# EAGLE board motherboard (EAGLE 4.16)
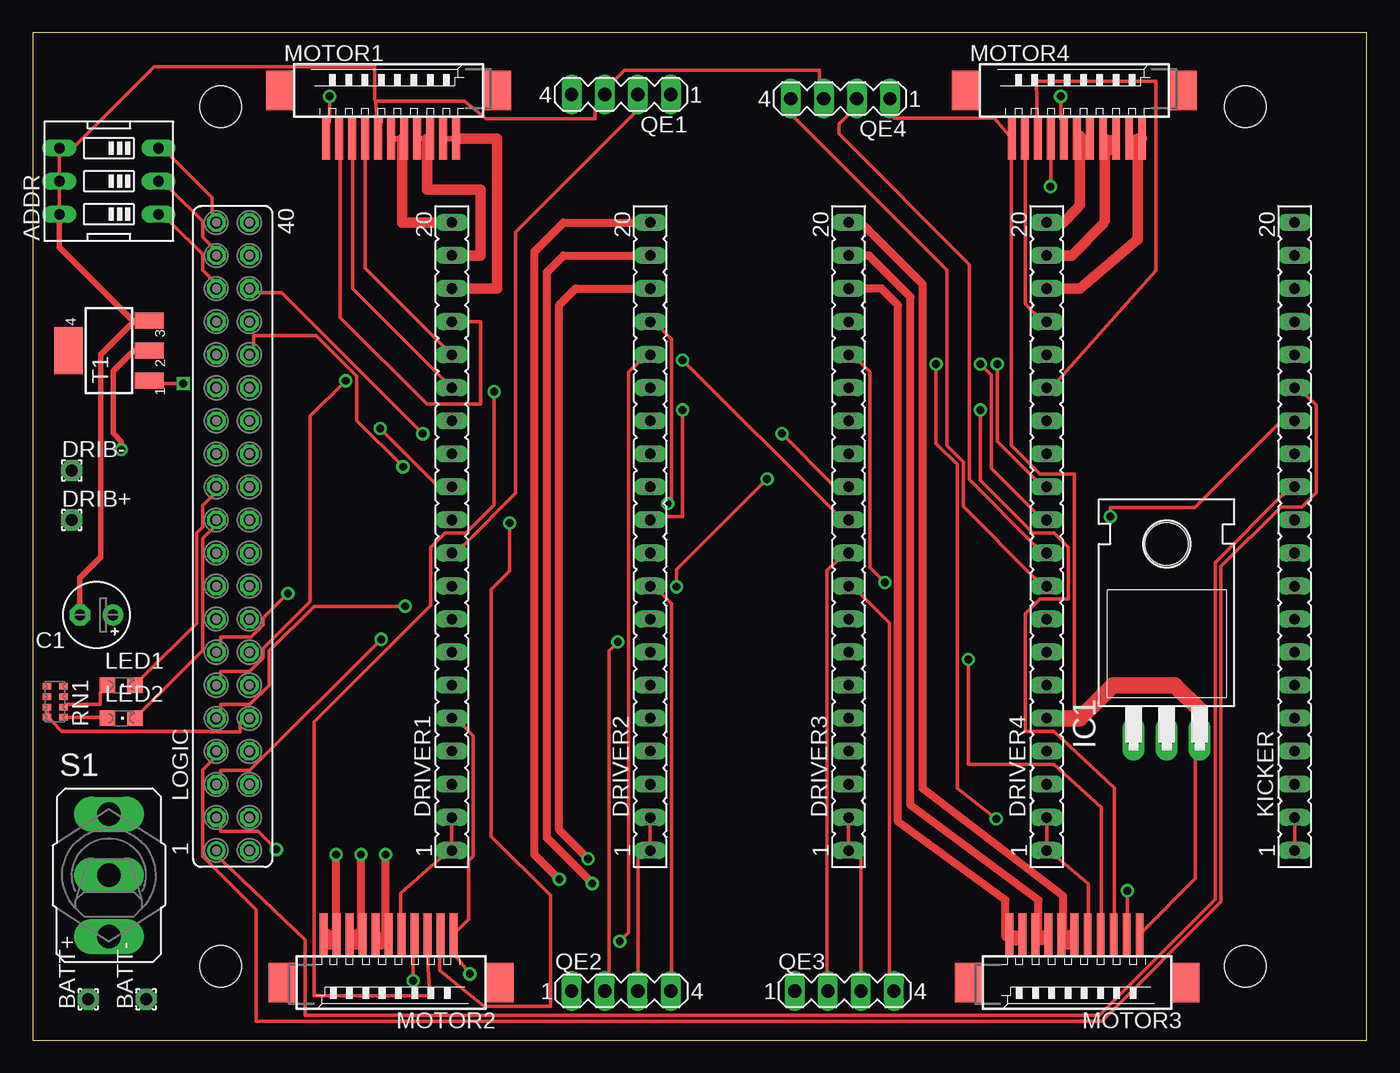
[diagram p0: board, top side]
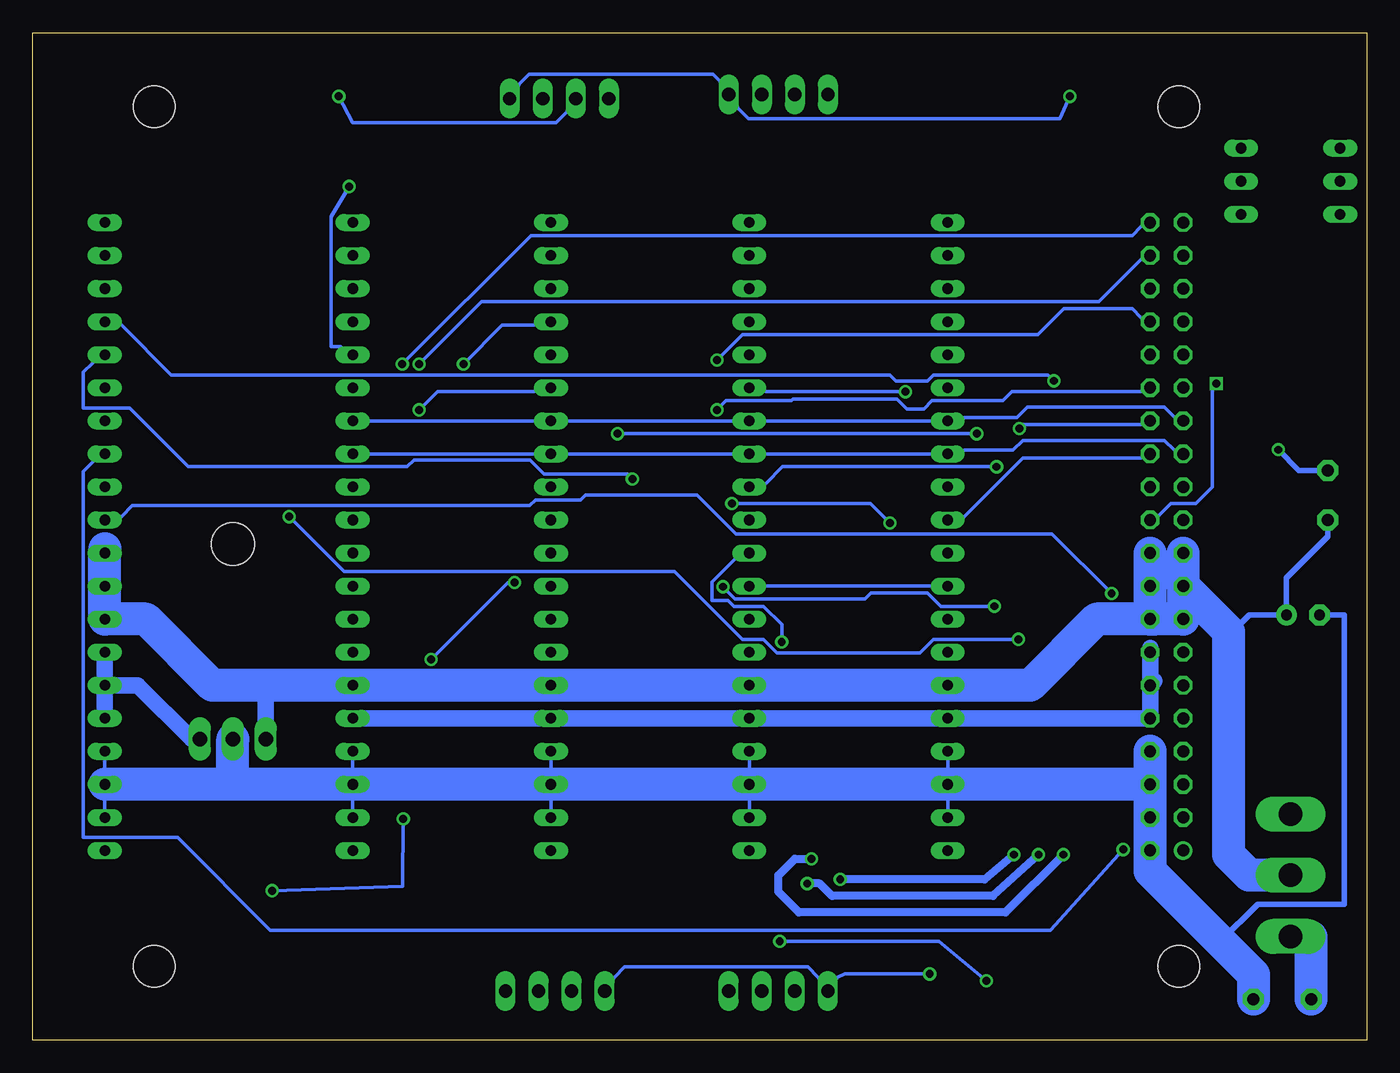
[diagram p1: board, bottom side, seen from below]

Size 102.54 x 77.46 mm. Coordinates in mm from the lower left corner, seen from the top.
Outline: 0,0 102.54,0 102.54,77.46 0,77.46 0,0
Copper layers (1*16): Top 0.035mm / dielectric 1.5mm / Bottom 0.035mm
Design rules "default": minimum track width 10mil, minimum drill 24mil, track to track 8mil, track to pad 8mil, pad to pad 8mil, via to via 8mil, smd to smd 8mil, copper to edge 40mil, drill to drill 8mil, minimum pad ring 10mil, minimum via ring 8mil, stop-mask expansion 4mil, vias tented up to drill 0mil, thermal gap 10mil
Net classes: 1 supply: width 0.508 mm; 2 motor: width 0.508 mm
Holes 3.2 mm at 14.44,5.71 14.44,71.75 93.18,5.71 93.18,71.75

## Footprints (pad centres in the part's own frame; a part is rotated, then mirrored left to right if it is on the bottom)
EDG-03 = drill 0.813 long: 1 -2.54,-3.81; 2 0,-3.81; 3 2.54,-3.81; 4 2.54,3.81; 5 0,3.81; 6 -2.54,3.81
1,6/0,9 = drill 0.914 pad 1.6 octagon: 1 0,0
E2,5-5 = drill 0.813 pad 1.6 round: + -1.27,0 | drill 0.813 pad 1.6 octagon: - 1.27,0
FE20 = drill 0.813 long: 1 -24.13,0; 2 -21.59,0; 3 -19.05,0; 4 -16.51,0; 5 -13.97,0; 6 -11.43,0; 7 -8.89,0; 8 -6.35,0; 9 -3.81,0; 10 -1.27,0; 11 1.27,0; 12 3.81,0; 13 6.35,0; 14 8.89,0; 15 11.43,0; 16 13.97,0; 17 16.51,0; 18 19.05,0; 19 21.59,0; 20 24.13,0
TO220H = drill 1.118 long: 1 -2.54,-10.16; 2 0,-10.16; 3 2.54,-10.16 | hole 3.302: 0,4.826
CHIPLED_0805 = smd 1.2 x 1.2: A 0,-1.05; C 0,1.05
FE20-2 = drill 0.914 round: 1 -24.13,1.27 | drill 0.914 octagon: 2 -24.13,-1.27; 3 -21.59,1.27; 4 -21.59,-1.27; 5 -19.05,1.27; 6 -19.05,-1.27; 7 -16.51,1.27; 8 -16.51,-1.27; 9 -13.97,1.27; 10 -13.97,-1.27; 11 -11.43,1.27; 12 -11.43,-1.27; 13 -8.89,1.27; 14 -8.89,-1.27; 15 -6.35,1.27; 16 -6.35,-1.27; 17 -3.81,1.27; 18 -3.81,-1.27; 19 -1.27,1.27; 20 -1.27,-1.27; 21 1.27,1.27; 22 1.27,-1.27; 23 3.81,1.27; 24 3.81,-1.27; 25 6.35,1.27; 26 6.35,-1.27; 27 8.89,1.27; 28 8.89,-1.27; 29 11.43,1.27; 30 11.43,-1.27; 31 13.97,1.27; 32 13.97,-1.27; 33 16.51,1.27; 34 16.51,-1.27; 35 19.05,1.27; 36 19.05,-1.27; 37 21.59,1.27; 38 21.59,-1.27; 39 24.13,1.27; 40 24.13,-1.27
53261-11 = smd 0.6 x 3.2: P$1 -3,-3.1; P$2 -2,-3.1; P$3 -1,-3.1; P$4 0,-3.1; P$5 1,-3.1; P$6 2,-3.1; P$7 3,-3.1; P$8 4,-3.1; P$9 5,-3.1; P$10 6,-3.1; P$11 7,-3.1 | smd 2.1 x 3: S1 10.15,0.625; S2 -6.55,0.625
MA04-1 = drill 1.016 long: 1 -3.81,0; 2 -1.27,0; 3 1.27,0; 4 3.81,0
0603-ARC = smd 0.5 x 0.65: 1 -1.2,-0.625; 2 -0.4,-0.625; 3 0.4,-0.625; 4 1.2,-0.625; 5 1.2,0.625; 6 0.4,0.625; 7 -0.4,0.625; 8 -1.2,0.625
M9040P = drill 1.803 long: 1 0,4.699; 2 0,0; 3 0,-4.699
SOT223 = smd 1.219 x 2.235: 1 -2.311,-3.099; 2 0,-3.099; 3 2.311,-3.099 | smd 3.6 x 2.2: 4 0,3.099

## Placement (x,y rotation side)
ADDR  [EDG-03]  5.87,66.03 90 top
BATT+  [1,6/0,9]  4.28,3.17 90 top
BATT-  [1,6/0,9]  8.73,3.17 90 top
C1  [E2,5-5]  4.92,32.7 180 top
DRIB+  [1,6/0,9]  3.01,40 0 top
DRIB-  [1,6/0,9]  3.01,43.81 0 top
DRIVER1  [FE20]  32.22,38.73 90 top
DRIVER2  [FE20]  47.46,38.73 90 top
DRIVER3  [FE20]  62.7,38.73 90 top
DRIVER4  [FE20]  77.94,38.73 90 top
IC1  7805T  [TO220H]  87.15,33.33 0 top
KICKER  [FE20]  96.99,38.73 90 top
LED1  [CHIPLED_0805]  6.82,27.3 270 top
LED2  [CHIPLED_0805]  6.82,24.76 270 top
LOGIC  [FE20-2]  15.39,38.73 90 top
MOTOR1  [53261-11]  25.55,72.38 0 top
MOTOR2  [53261-11]  29.36,5.08 180 top
MOTOR3  [53261-11]  82.07,5.08 180 top
MOTOR4  [53261-11]  78.26,72.38 0 top
QE1  [MA04-1]  45.24,72.7 180 top
QE2  [MA04-1]  45.24,3.8 0 top
QE3  [MA04-1]  62.38,3.8 0 top
QE4  [MA04-1]  62.06,72.38 180 top
RN1  [0603-ARC]  1.74,26.03 90 top
S1  [M9040P]  5.87,12.7 0 top
T1  [SOT223]  5.87,53.02 90 top

## Library data of the parts
ADDR = special
BATT+ BATT- DRIB+ DRIB- = wirepad
C1 = rcl
DRIVER1-DRIVER4 KICKER LOGIC = con-lsta
IC1 = linear
LED1 LED2 = led
MOTOR1-MOTOR4 = brushless
QE1-QE4 = con-lstb
RN1 = resistor-dil
S1 = switch
T1 = zetex

## Nets
+5V: DRIVER1.5 DRIVER2.5 DRIVER3.5 DRIVER4.5 IC1.3 KICKER.5 KICKER.6 KICKER.7 LOGIC.10 LOGIC.12 LOGIC.14 MOTOR1.P$1 MOTOR2.P$1 MOTOR3.P$1 MOTOR4.P$1 QE1.1 QE2.1 QE3.1 QE4.1 RN1.7 RN1.8
+12V: C1.+ DRIB+.1 DRIVER1.6 DRIVER2.6 DRIVER3.6 DRIVER4.6 IC1.1 KICKER.8 KICKER.9 KICKER.10 LOGIC.15 LOGIC.16 LOGIC.17 LOGIC.18 LOGIC.19 LOGIC.20 S1.2
ADDR1: ADDR.3 LOGIC.39
ADDR2: ADDR.2 LOGIC.37
ADDR3: ADDR.1 LOGIC.35
CAP: KICKER.16 LOGIC.9
CHARGE: KICKER.11 LOGIC.13
DIR1: DRIVER1.12 LOGIC.28
DIR2: DRIVER2.12 LOGIC.32
DIR3: DRIVER3.12 LOGIC.36
DIR4: DRIVER4.12 LOGIC.40
DISCHARGE: KICKER.17 LOGIC.11
DRIBBLER: LOGIC.22 T1.1
GND: ADDR.4 ADDR.5 ADDR.6 BATT-.1 C1.- DRIVER1.1 DRIVER1.2 DRIVER1.3 DRIVER1.4 DRIVER2.1 DRIVER2.2 DRIVER2.3 DRIVER2.4 DRIVER3.1 DRIVER3.2 DRIVER3.3 DRIVER3.4 DRIVER4.1 DRIVER4.2 DRIVER4.3 DRIVER4.4 IC1.2 KICKER.1 KICKER.2 KICKER.3 KICKER.4 LOGIC.2 LOGIC.4 LOGIC.6 LOGIC.8 MOTOR1.P$5 MOTOR2.P$5 MOTOR3.P$5 MOTOR4.P$5 QE1.3 QE2.3 QE3.3 QE4.3 T1.3
KICK1: KICKER.15 LOGIC.7
KICK2: KICKER.14 LOGIC.5
KICK3: KICKER.13 LOGIC.3
KICK4: KICKER.12 LOGIC.1
LED1: LED1.C LOGIC.23
LED2: LED2.C LOGIC.21
M1H1: DRIVER1.15 MOTOR1.P$3
M1H2: DRIVER1.16 MOTOR1.P$4
M1H3: DRIVER1.17 MOTOR1.P$2
M1P1: DRIVER1.18 MOTOR1.P$10 MOTOR1.P$11
M1P2: DRIVER1.19 MOTOR1.P$8 MOTOR1.P$9
M1P3: DRIVER1.20 MOTOR1.P$6 MOTOR1.P$7
M2H1: DRIVER2.15 MOTOR2.P$3
M2H2: DRIVER2.16 MOTOR2.P$4
M2H3: DRIVER2.17 MOTOR2.P$2
M2P1: DRIVER2.18 MOTOR2.P$10 MOTOR2.P$11
M2P2: DRIVER2.19 MOTOR2.P$8 MOTOR2.P$9
M2P3: DRIVER2.20 MOTOR2.P$6 MOTOR2.P$7
M3H1: DRIVER3.15 MOTOR3.P$3
M3H2: DRIVER3.16 MOTOR3.P$4
M3H3: DRIVER3.17 MOTOR3.P$2
M3P1: DRIVER3.18 MOTOR3.P$10 MOTOR3.P$11
M3P2: DRIVER3.19 MOTOR3.P$8 MOTOR3.P$9
M3P3: DRIVER3.20 MOTOR3.P$6 MOTOR3.P$7
M4H1: DRIVER4.15 MOTOR4.P$3
M4H2: DRIVER4.16 MOTOR4.P$4
M4H3: DRIVER4.17 MOTOR4.P$2
M4P1: DRIVER4.18 MOTOR4.P$10 MOTOR4.P$11
M4P2: DRIVER4.19 MOTOR4.P$8 MOTOR4.P$9
M4P3: DRIVER4.20 MOTOR4.P$6 MOTOR4.P$7
N$1: LED2.A RN1.1
N$2: BATT+.1 S1.3
N$3: LED1.A RN1.2
N$4: DRIB-.1 T1.2
QEA1: DRIVER1.10 QE1.2
QEA2: DRIVER2.10 QE2.2
QEA3: DRIVER3.10 QE3.2
QEA4: DRIVER4.10 QE4.2
QEB1: QE1.4
QEB2: DRIVER1.9 DRIVER2.9 QE2.4
QEB3: DRIVER3.9 QE3.4
QEB4: DRIVER4.9 QE4.4
RX: DRIVER1.13 DRIVER2.13 DRIVER3.13 DRIVER4.13 LOGIC.25
SPEED1: DRIVER1.11 LOGIC.26
SPEED2: DRIVER2.11 LOGIC.30
SPEED3: DRIVER3.11 LOGIC.34
SPEED4: DRIVER4.11 LOGIC.38
TX: DRIVER1.14 DRIVER2.14 DRIVER3.14 DRIVER4.14 LOGIC.27

## Tracks (layer width: path | path; a pad name or v marks a point on that pad's centre or on a via)
+5V  (via drill 0.61)
  Top 0.254: QE4.1 66.2,70.89 66.2,70.86 73.91,70.86 MOTOR4.P$1 75.21,68.91 75.21,45.73 77.41,43.53 80.05,43.53 80.05,24.76 | v22.82,72.55 22.82,70.86 MOTOR1.P$1 | DRIVER1.5 33.16,24.12 33.87,23.41 33.87,14.17 33.49,13.79 33.49,9.29 32.75,8.55 MOTOR2.P$1 32.44,6.6 v33.6,5.11 | MOTOR3.P$1 85.46,8.55 89.34,12.44 89.34,21.51 IC1.3 | RN1.7 1.16,25.39 1.16,25.06 RN1.8 1.44,24.58 2.25,23.77 13.63,23.77 13.63,23.74 13.65,23.72 15.96,23.72 15.96,24.45 LOGIC.10
  Top 1.27: IC1.3 89.69,25.39 87.78,27.3 83.02,27.3 80.48,24.76 80.05,24.76 DRIVER4.5 77.62,24.76
  Bottom 0.254: v22.82,72.55 23.58,70.84 47.51,70.84 48.3,71.62 QE1.1 49.8,73.78 50.25,74.24 64.38,74.24 65.14,73.48 QE4.1 | QE3.1 57.82,4.87 57.04,5.66 42.96,5.66 42.18,4.87 QE2.1 40.68,4.87 40.12,5.11 v33.6,5.11
  Bottom 1.27: DRIVER4.5 DRIVER3.5 DRIVER2.5 DRIVER1.5 LOGIC.10 LOGIC.12 | KICKER.6 KICKER.5 | KICKER.6 KICKER.7 | IC1.3 90.32,23.17 94.45,27.3 KICKER.6 | LOGIC.12 16.34,27.62 | 16.66,30.16 LOGIC.14 LOGIC.12
+12V
  Bottom 0.254: LOGIC.16 15.91,31.34
  Bottom 0.406: C1.+ 9.04,32.7 10.63,31.11 | DRIB+.1 3.01,38.73 6.18,35.55 C1.+ | C1.+ 6.18,32.38
  Bottom 1.27: 84.61,27.3 IC1.1
  Bottom 2.54: DRIVER2.6 47.78,27.3 | DRIVER2.6 DRIVER1.6 25.87,27.3 20.79,32.38 LOGIC.16 | DRIVER2.6 DRIVER3.6 DRIVER4.6 84.61,27.3 88.73,27.3 93.81,32.38 KICKER.8 KICKER.9 KICKER.10 96.99,37.78 | LOGIC.16 16.66,32.7 16.34,32.38 LOGIC.15 LOGIC.17 | LOGIC.17 LOGIC.19 LOGIC.17 | LOGIC.20 LOGIC.18 LOGIC.16 | S1.2 9.04,12.7 10.63,14.28 10.63,31.11 10.63,31.43 LOGIC.17
ADDR1
  Top 0.254: ADDR.3 10.63,67.94 13.81,64.77 13.81,63.55 LOGIC.39
ADDR2
  Top 0.254: ADDR.2 10.63,65.4 13.07,62.96 13.07,61.74 13.81,61.01 LOGIC.37
ADDR3
  Top 0.254: ADDR.1 10.63,62.86 13.07,60.42 13.07,59.2 13.81,58.47 LOGIC.35
CAP  (via drill 0.61)
  Top 0.254: v56.45,43.15 49.49,36.19 v49.49,34.87 | v28.64,33.37 21.63,33.37 18.17,29.92 18.17,27.3 16.7,25.83 14.44,25.83 14.44,25.45 LOGIC.9
  Bottom 0.254: v56.45,43.15 56.83,43.53 63.23,43.53 64.33,44.62 73.22,44.62 73.75,44.09 90.56,44.09 95.08,48.61 98.64,48.61 98.64,51.35 97.93,52.07 KICKER.16 | v49.49,34.87 48.55,33.93 38.57,33.93 38.11,34.39 33.77,34.39 32.75,33.37 v28.64,33.37
CHARGE  (via drill 0.61)
  Top 0.254: v19.62,34.36 17.72,32.46 17.72,31.92 16.8,31.01 14.44,31.01 14.44,30.53 LOGIC.13
  Bottom 0.254: v19.62,34.36 24.19,38.93 48.48,38.93 51.47,41.93 60.06,41.93 60.44,41.55 63.89,41.55 64.35,41.09 94.88,41.09 95.69,40.28 KICKER.11
DIR1  (via drill 0.61)
  Top 0.254: v26.71,47.04 30.92,42.82 DRIVER1.12
  Bottom 0.254: v26.71,47.04 26.43,47.32 17.36,47.32 LOGIC.28
DIR2  (via drill 0.61)
  Top 0.254: v28.46,44.09 24.9,47.65 24.9,51.05 21.78,54.17 16.98,54.17 16.98,53.39 LOGIC.32
  Bottom 0.254: v28.46,44.09 44.89,44.09 46.16,42.82 DRIVER2.12
DIR3  (via drill 0.61)
  Top 0.254: v57.59,46.63 61.41,42.82 DRIVER3.12 | v29.98,46.63 19.14,57.48 17.36,57.48 LOGIC.36
  Bottom 0.254: v29.98,46.63 v57.59,46.63
DIR4  (via drill 0.61)
  Top 0.254: v74.13,51.99 74.13,46.05 77,43.18 DRIVER4.12
  Bottom 0.254: v74.13,51.99 64.25,61.87 18.05,61.87 17.36,62.55 LOGIC.40
DISCHARGE  (via drill 0.61)
  Top 0.254: v24.07,50.69 21.35,47.98 21.35,33.75 17.72,30.12 17.72,29.38 16.7,28.37 14.44,28.37 14.44,27.99 LOGIC.11
  Bottom 0.254: v24.07,50.69 24.52,51.15 33.31,51.15 33.77,50.69 36.18,50.69 36.64,51.15 91.89,51.15 95.69,54.96 KICKER.17
DRIBBLER  (via drill 0.6)
  Top 0.254: v11.58,50.48 8.73,50.48 8.41,50.8 9.04,50.8 T1.1
  Bottom 0.254: LOGIC.22 16.34,40 15.08,41.27 13.17,41.27 11.9,42.54 11.9,50.16 v11.58,50.48
GND  (via drill 0.61)
  Top 0.254: 26.35,72.17 26.49,70.72 26.81,70.86 MOTOR1.P$5 | 26.35,72.17 33.19,72.17 34.84,70.84 43.22,70.84 43.22,71.62 QE1.3 44.72,73.78 45.5,74.57 60.46,74.57 60.46,73.88 QE4.3 | v79.01,72.55 79.01,70.86 MOTOR4.P$5 | DRIVER3.2 DRIVER3.1 63.64,13.97 63.64,5.3 QE3.3 | DRIVER2.2 DRIVER2.1 46.52,13.97 46.52,5.3 QE2.3 | MOTOR2.P$5 28.3,8.55 28.3,11.3 31.28,13.97 DRIVER1.1 DRIVER1.2 | MOTOR3.P$5 81.13,8.55 81.13,12.04 78.88,13.97 DRIVER4.1 DRIVER4.2 | KICKER.2 KICKER.1 | ADDR.6 2.07,64.13 2.07,65.4 ADDR.5 2.07,66.67 2.07,67.94 ADDR.4 3.37,68.85 9.36,74.85 26.3,74.85 26.3,72.28 26.35,72.17
  Top 0.406: C1.- 3.64,35.55 5.23,37.14 5.23,52.7 7.77,55.24 | T1.3 8.97,55.32 9.04,55.24 7.77,55.24 | ADDR.6 2.06,60.96 7.77,55.24
  Bottom 0.254: v79.01,72.55 77.94,70.53 62.29,70.53 61.53,71.29 QE4.3 | DRIVER1.2 DRIVER1.3 DRIVER1.4 | DRIVER2.4 DRIVER2.3 DRIVER2.2 | DRIVER3.4 DRIVER3.3 DRIVER3.2 | DRIVER4.2 DRIVER4.3 DRIVER4.4 | KICKER.4 KICKER.3 KICKER.2
  Bottom 0.406: C1.- 1.74,32.7 1.74,10.47 8.41,10.47 11.27,7.62 11.58,7.3
  Bottom 2.54: LOGIC.6 DRIVER1.3 DRIVER2.3 DRIVER3.3 DRIVER4.3 87.15,19.68 | 87.15,19.68 KICKER.3 | LOGIC.6 LOGIC.4 LOGIC.2 16.66,13.01 11.27,7.62 8.73,5.08 BATT-.1 | 87.15,19.68 IC1.2 | LOGIC.6 LOGIC.8
KICK1
  Top 0.254: KICKER.15 97.93,49.53 98.64,48.81 98.64,42.11 97.52,40.99 95.8,40.99 95.8,40.89 91.33,36.42 91.33,10.64 82.18,1.49 17.18,1.49 17.18,10.03 13.07,14.14 13.07,20.8 13.81,21.53 LOGIC.7
KICK2  (via drill 0.61)
  Top 0.254: v82.82,40.25 82.82,40.97 89.32,40.97 95.69,47.34 KICKER.14 | v26.78,30.83 16.7,20.75 14.44,20.75 14.44,20.37 LOGIC.5
  Bottom 0.254: v82.82,40.25 78.6,36.04 53.2,36.04 47.99,30.83 46.37,30.83 45.33,29.79 34.35,29.79 33.31,30.83 v26.78,30.83
KICK3  (via drill 0.61)
  Top 0.254: v18.73,14.68 17.34,16.07 14.44,16.07 14.44,16.45 LOGIC.3
  Bottom 0.254: v18.73,14.68 24.32,8.45 84.27,8.45 91.4,15.59 98.64,15.59 98.64,43.73 97.93,44.45 KICKER.13
KICK4
  Top 0.254: KICKER.12 96.05,41.91 90.87,36.72 90.87,10.84 81.98,1.95 20.93,1.95 20.93,7.74 14.44,13.91 LOGIC.1
LED1
  Top 0.254: LED1.C 8.45,27.88 12.61,32.05 12.61,38.98 13.07,39.44 13.07,41.12 13.81,41.85 LOGIC.23
LED2
  Top 0.254: LED2.C 8.45,25.34 13.07,29.97 13.07,38.58 13.81,39.31 LOGIC.21
M1H1
  Top 0.254: MOTOR1.P$3 24.6,69.24 24.6,57.78 DRIVER1.15
M1H2
  Top 0.254: MOTOR1.P$4 25.55,59.37 DRIVER1.16
M1H3
  Top 0.254: 32.54,55.24 DRIVER1.17 34.44,55.24 34.44,48.89 30.31,48.89 23.65,55.56 23.65,69.19 MOTOR1.P$2
M1P1
  Top 0.406: MOTOR1.P$11 32.54,69.28 | 32.54,69.28 MOTOR1.P$10 | 32.54,69.28 32.54,69.53
  Top 0.813: DRIVER1.18 35.71,57.78 35.71,69.28 MOTOR1.P$11
M1P2
  Top 0.406: 29.68,69.28 MOTOR1.P$8 | 29.68,69.28 MOTOR1.P$9 30.31,69.28 | 29.68,69.28 29.68,69.21
  Top 0.813: 30.31,69.28 30.31,69.21 30.31,65.4 34.44,65.4 34.44,60.32 DRIVER1.19
M1P3
  Top 0.406: 27.77,69.28 MOTOR1.P$6 | 27.77,69.28 MOTOR1.P$7 28.41,69.28 | 27.77,69.28 27.77,69.21
  Top 0.813: DRIVER1.20 28.41,62.86 28.41,69.28
M2H1  (via drill 0.61)
  Top 0.254: v35.47,49.86 35.47,41.17 33.41,39.11 33.41,39.01 31.69,39.01 30.57,37.89 30.57,33.42 21.63,24.48 21.63,3.44 30.54,3.44 30.39,5.51 30.39,6.6 MOTOR2.P$3
  Bottom 0.254: v35.47,49.86 35.5,49.88 46.16,49.88 DRIVER2.15
M2H2  (via drill 0.61)
  Top 0.254: v29.23,4.59 29.23,6.6 MOTOR2.P$4 | v45.12,7.62 45.81,8.3 45.81,51.35 46.52,52.07 DRIVER2.16
  Bottom 0.254: v29.23,4.59 32.89,7.62 v45.12,7.62
M2H3  (via drill 0.61)
  Top 0.254: v36.66,39.77 36.66,36.06 35.24,34.64 35.24,15.69 39.79,11.15 39.79,2.61 34.71,2.61 31.29,5.39 31.29,6.6 MOTOR2.P$2 | v48.81,41.27 49.11,41.58 49.11,53.89 48.4,54.61 DRIVER2.17
  Bottom 0.254: v36.66,39.77 38.16,41.27 v48.81,41.27
M2P1  (via drill 0.6)
  Top 0.61: DRIVER2.18 41.74,57.78 40.48,56.51 40.48,16.19 v42.7,13.97 | v23.33,14.28 23.33,7.62 23.36,7.58 MOTOR2.P$10 23.01,8.18 23.01,7.3 22.7,7.3 22.7,8.18 | 22.7,8.18 22.7,8.25 | MOTOR2.P$11 22.7,8.18
  Bottom 0.61: v42.7,13.97 43.97,13.97 45.24,12.7 45.24,11.43 43.65,9.84 27.77,9.84 v23.33,14.28
M2P2  (via drill 0.6)
  Top 0.61: DRIVER2.19 40.79,60.32 39.52,59.05 39.52,15.55 v43.02,12.06 | v25.23,14.28 25.23,7.62 25.27,7.58 MOTOR2.P$8 24.92,8.18 | MOTOR2.P$9 24.6,8.18 24.6,7.3 24.92,7.3 24.92,8.18 | 24.92,8.18 24.92,8.25
  Bottom 0.61: v43.02,12.06 42.06,12.06 41.11,11.11 28.73,11.11 v25.23,14.28
M2P3  (via drill 0.6)
  Top 0.254: MOTOR2.P$6 27.09,7.76 26.99,7.59
  Top 0.61: DRIVER2.20 40.79,62.86 38.57,60.64 38.57,14.28 v40.48,12.38 | MOTOR2.P$6 27.36,7.52 27.14,7.3 v27.14,14.28 | MOTOR2.P$7 26.5,8.18 26.5,7.3 26.82,7.3 26.82,7.76 | 26.82,7.76 26.82,7.93 | 26.82,7.76 27.09,7.76
  Bottom 0.61: v40.48,12.38 29.36,12.38 v27.14,14.28
M3H1  (via drill 0.61)
  Top 0.254: v72.83,48.46 72.83,43.02 76.75,39.11 76.75,39.01 78.47,39.01 79.59,37.89 79.59,33.93 77.41,33.93 76.29,32.81 76.29,23.77 78.47,23.77 83.13,19.43 83.13,8.55 MOTOR3.P$3
  Bottom 0.254: v72.83,48.46 71.41,49.88 63.99,49.88 DRIVER3.15
M3H2  (via drill 0.61)
  Top 0.254: v71.92,29.28 71.92,21.23 78.47,21.23 82.12,17.9 82.12,8.87 MOTOR3.P$4 | v65.49,35.2 64.35,36.34 64.35,51.35 63.64,52.07 DRIVER3.16
  Bottom 0.254: v71.92,29.28 66,35.2 v65.49,35.2
M3H3  (via drill 0.61)
  Top 0.254: v84.12,11.51 84.12,8.55 MOTOR3.P$2 | v74.05,17.04 71.08,19.38 71.08,44.24 69.43,45.89 v69.43,51.99
  Bottom 0.254: v84.12,11.51 74.11,11.84 v74.05,17.04 | v69.43,51.99 66.46,54.96 63.99,54.96 DRIVER3.17
M3P1
  Top 0.61: DRIVER3.18 65.24,57.78 66.51,56.51 66.51,16.82 74.77,10.79 74.77,7.93 75.08,7.93 | MOTOR3.P$10 75.4,8.18 75.4,7.62 | 75.4,7.62 75.72,7.62 | 75.08,8.18 75.08,8.25 | 75.4,7.62 75.08,7.62 75.08,7.93 | 75.08,8.18 75.08,7.93 | MOTOR3.P$11 75.08,8.18
M3P2
  Top 0.61: DRIVER3.19 64.29,60.32 67.46,57.15 67.46,18.09 77.3,10.79 77.3,7.62 77.94,7.62 | MOTOR3.P$9 77.94,8.18 | 77.98,7.58 77.94,7.58 77.94,7.62 | 77.94,8.18 77.94,8.25 | 77.94,8.18 MOTOR3.P$8 | 77.94,8.18 77.94,7.62
M3P3
  Top 0.61: DRIVER3.20 63.65,62.86 68.41,58.1 68.41,19.36 79.21,11.11 79.21,7.62 79.17,7.58 MOTOR3.P$7 79.53,8.18 79.53,7.3 79.84,7.3 79.84,8.18 | 79.84,8.18 79.84,8.25 | 79.84,8.18 MOTOR3.P$6
M4H1
  Top 0.254: MOTOR4.P$3 77.19,71.5 77.19,72.17 77.14,73.71 86.31,73.71 86.31,59.18 78.88,50.8 DRIVER4.15
M4H2  (via drill 0.61)
  Top 0.254: v78.21,65.63 78.26,65.63 MOTOR4.P$4
  Bottom 0.254: v78.21,65.63 79.59,63.29 79.59,53.34 78.88,53.34 DRIVER4.16
M4H3
  Top 0.254: MOTOR4.P$2 76.29,68.91 76.29,56.59 77,55.88 DRIVER4.17
M4P1
  Top 0.61: MOTOR4.P$11 85.24,69.28 | 85.24,69.28 MOTOR4.P$10 | 85.24,69.28 85.24,69.21
  Top 0.813: DRIVER4.18 80.48,57.78 84.89,61.56 84.92,61.56 84.92,69.28 MOTOR4.P$11
  Top 1.016: DRIVER4.18 77.62,57.78
M4P2
  Top 0.61: 83.02,69.28 MOTOR4.P$9 | 82.39,69.28 83.02,69.28 | 83.02,69.28 83.02,69.21 | 82.39,68.26 82.7,68.26 82.7,69.28 MOTOR4.P$8
  Top 0.813: DRIVER4.19 79.84,60.32 82.26,62.73 82.39,63.05 82.39,68.26 82.39,69.28
M4P3
  Top 0.61: 80.48,67.94 80.8,67.94 80.8,69.28 MOTOR4.P$7 | 80.48,69.28 MOTOR4.P$6
  Top 0.813: DRIVER4.20 79.21,62.86 80.26,63.91 80.48,64.22 80.48,67.94 80.48,69.28 80.48,69.53
  Top 1.016: DRIVER4.20 77.62,62.86
N$1
  Top 0.254: RN1.1 2.68,24.84 5.19,24.84 LED2.A
N$2
  Bottom 2.54: BATT+.1 4.28,7.93 5.87,7.93 S1.3
N$3
  Top 0.254: RN1.2 2.68,25.83 5.19,25.83 5.19,26.72 LED1.A
N$4  (via drill 0.6)
  Top 0.406: v6.82,45.4 6.82,46.03 6.18,46.67 6.18,51.43 7.77,53.02 T1.2
  Bottom 0.406: DRIB-.1 5.23,43.81 v6.82,45.4
QEA1
  Top 0.254: DRIVER1.10 33.16,38.1 37.12,42.06 37.12,62.12 46.19,71.19 QE1.2
QEA2  (via drill 0.61)
  Top 0.254: v44.97,30.63 44.28,29.94 44.28,5.3 QE2.2
  Bottom 0.254: v44.97,30.63 44.97,31.97 46.37,33.37 48.65,33.37 49.11,33.83 50.33,33.83 50.33,35.25 48.58,37 DRIVER2.10
QEA3
  Top 0.254: DRIVER3.10 61.76,36.83 61.05,36.11 61.05,5.3 QE3.2
QEA4
  Top 0.254: DRIVER4.10 77,38.1 72,43.1 72,59.63 61.96,69.67 61.96,70.4 62.73,71.17 QE4.2
QEB2
  Top 0.254: QE2.4 49.11,5.3 49.11,33.57 48.4,34.29 DRIVER2.9
  Bottom 0.254: DRIVER2.9 DRIVER1.9
QEB3
  Top 0.254: DRIVER3.9 63.64,34.29 65.85,32.08 65.85,5.28 QE3.4
QEB4
  Top 0.254: DRIVER4.9 77,35.55 71.54,41.02 71.54,44.45 70.27,45.72 70.27,59.2 58.59,70.89 QE4.4
RX
  Bottom 0.254: DRIVER4.13 DRIVER3.13 DRIVER2.13 DRIVER1.13 30.92,45.36 27.19,45.36 26.43,46.12 15.56,46.12 14.82,45.39 LOGIC.25
SPEED1
  Bottom 0.254: DRIVER1.11 30.92,40.28 26.43,44.78 17.36,44.78 LOGIC.26
SPEED2  (via drill 0.61)
  Top 0.254: v49.95,48.46 49.95,40.28 48.75,40.28 DRIVER2.11
  Bottom 0.254: v49.95,48.46 49.24,49.17 44.23,49.17 44.11,49.3 36.11,49.3 35.34,48.53 34.05,48.53 33.41,49.17 27.98,49.17 27.29,49.86 17.36,49.86 LOGIC.30
SPEED3  (via drill 0.61)
  Top 0.254: v49.95,52.29 61.68,40.56 DRIVER3.11
  Bottom 0.254: v49.95,52.29 47.99,54.25 25.29,54.25 23.3,56.23 18.05,56.23 17.36,55.55 LOGIC.34
SPEED4  (via drill 0.61)
  Top 0.254: v72.83,51.99 73.67,51.15 73.67,43.96 77,40.64 DRIVER4.11
  Bottom 0.254: v72.83,51.99 68.03,56.79 20.59,56.79 17.36,60.02 LOGIC.38
TX
  Bottom 0.254: DRIVER4.14 DRIVER3.14 DRIVER2.14 DRIVER1.14 30.92,47.87 26.89,47.87 26.1,48.66 15.56,48.66 14.82,47.93 LOGIC.27